# Altium PCB JLink_ARM-OB_072_Pcb.PcbDoc
Units mil, origin at the board's own origin, x right, y up, seen from the top; angles counter-clockwise.
Board outline 925 x 450 mil, 2 copper layers (Top Layer, Bottom Layer); 25 components, 25 nets, 113 pads, 26 vias.
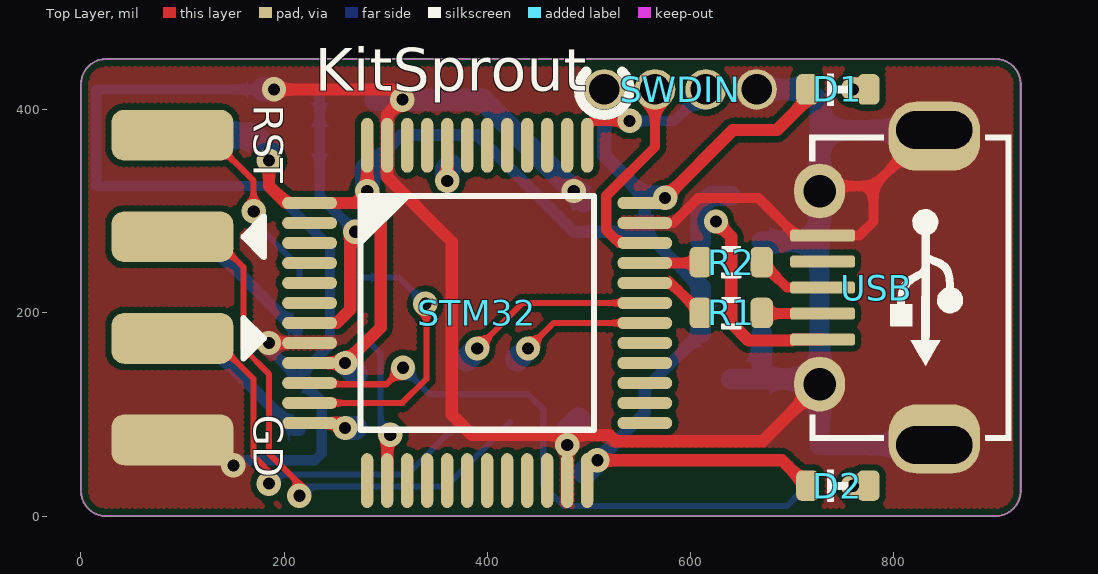
[diagram p0: Top Layer view]
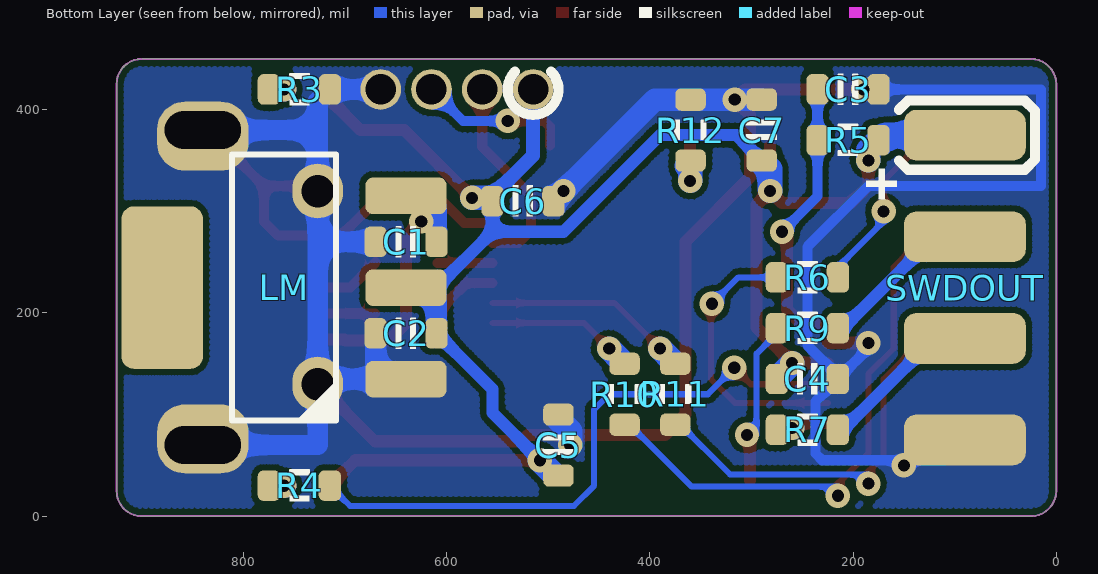
[diagram p1: Bottom Layer view, seen from below]
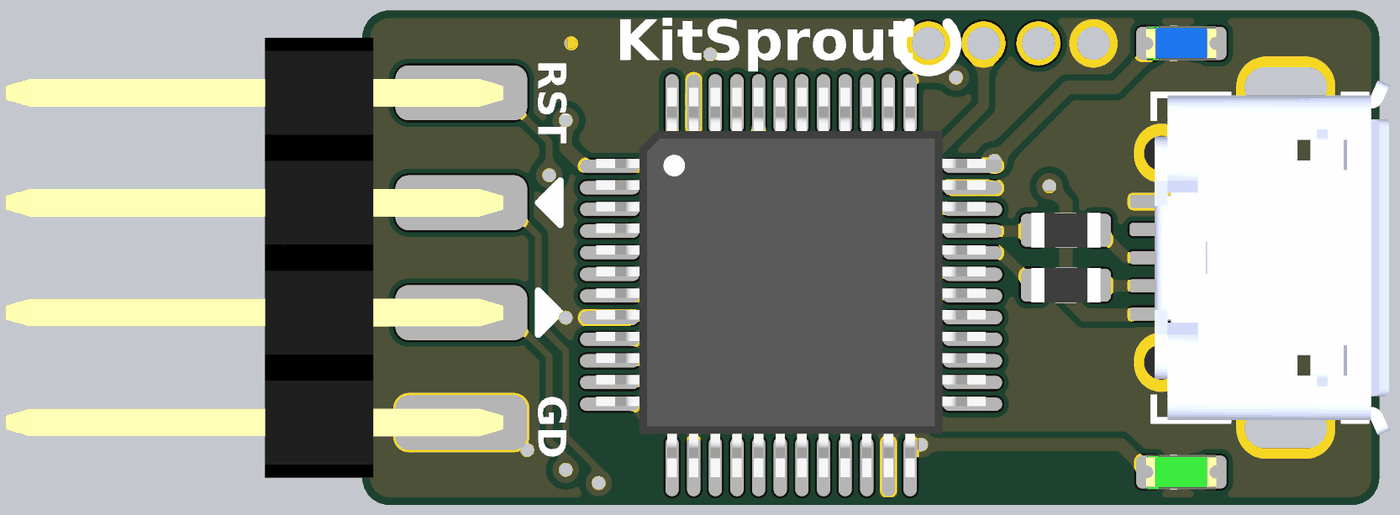
[diagram p2: 3D render of the assembled board from above, using the file's embedded part models]
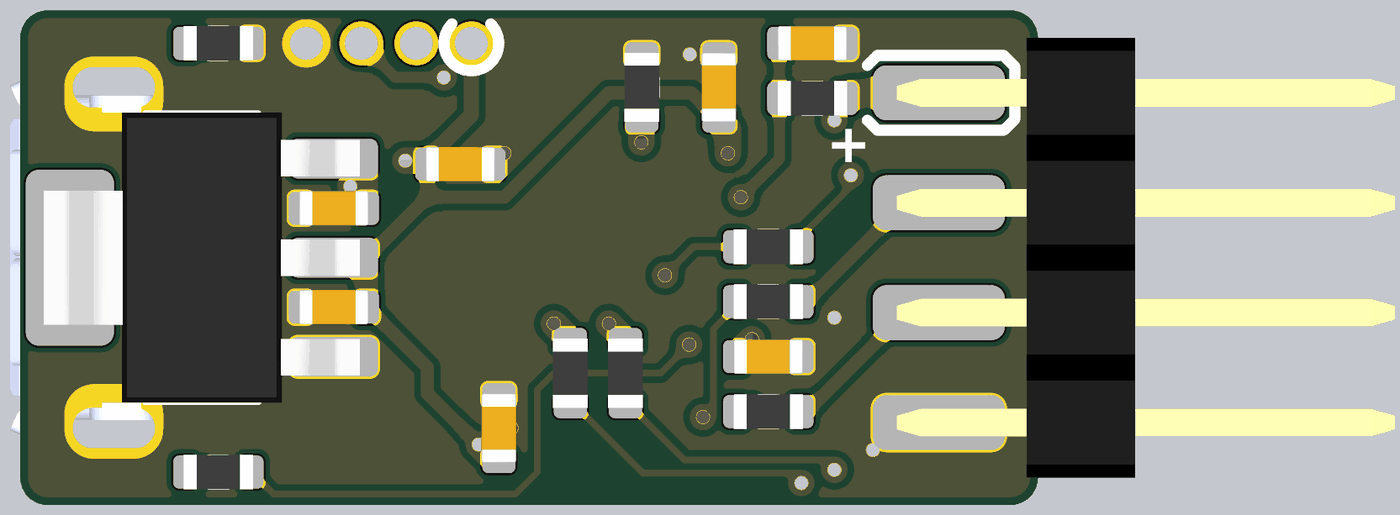
[diagram p3: 3D render of the assembled board from below, using the file's embedded part models]

## Layer stack, top to bottom
Top Solder: solder mask 0.4, Solder Resist, Dk 3.5
Top Layer: signal copper 1.4
Dielectric 1: dielectric 12.6, FR-4, Dk 4.8
Bottom Layer: signal copper 1.4
Bottom Solder: solder mask 0.4, Solder Resist, Dk 3.5

## Board outline
0,25 0,425 cw(c25,425) 25,450 900,450 cw(c900,425) 925,425 925,25 cw(c900,25) 900,0 25,0 cw(c25,25)

## Design rules (kind name [scope] priority, off if disabled: settings)
Clearance ClearancePolygon [InPolygon] p1: gap=6 ignorepadtopadclearanceinfootprint=FALSE except(0: Arc-Hole Track-Hole SMDPad-Hole THPad-Hole Via-Hole Fill-Hole Poly-Hole Region-Hole Text-Hole)
Clearance [All] p2: gap=6 ignorepadtopadclearanceinfootprint=FALSE except(0: Arc-Hole Track-Hole SMDPad-Hole THPad-Hole Via-Hole Fill-Hole Poly-Hole Region-Hole Text-Hole)
ComponentClearance [All] p1: gap=0 collisioncheckmode=3 verticalgap=0 showdistances=FALSE
Height [All] p1: minheight=0 maxheight=5000 prefheight=500
HoleSize [All] p1: absolutevalues=TRUE maxlimit=200 minlimit=1 maxpercent=80.000 minpercent=20.000
HoleToHoleClearance [All] p1: gap=6 allowstackedmicrovias=TRUE
MinimumSolderMaskSliver [All] p1: minsoldermaskwidth=0
PolygonConnect [All] p1: connectstyle=Direct reliefconductorwidth=10 reliefentries=4 polygonreliefangle="90 Angle" airgapwidth=10
RoutingVias [All] p1: holewidth=12 width=24 viastyle="Through Hole" minholewidth=12 minwidth=20 maxholewidth=28 maxwidth=50
SilkToSilkClearance [All] p1: silktosilkclearance=0
SilkToSolderMaskClearance [IsPad] p1: minsilkscreentomaskgap=0 clearancetoexposedcopper=TRUE
SolderMaskExpansion [All] p1: expansion=2 istentingtop=FALSE
Width [All] p1: maxlimit=50 minlimit=6 preferedwidth=10
23 further rules are at their usual default settings.

## Components (designator, comment, footprint, x,y, rotation, side; value= is the part's Value field where it differs from the comment)
C1 "Cap_0603" CAP_0603 640,270 r180 bottom
C2 "Cap_0603" CAP_0603 640,180 r180 bottom
C3 "Cap_0603" CAP_0603 205,420 r0 bottom
C4 "Cap_0603" CAP_0603 245,135 r0 bottom
C5 "Cap_0603" CAP_0603 490,70 r270 bottom
C6 "Cap_0603" CAP_0603 525,310 r0 bottom
C7 "Cap_0603" CAP_0603 290,380 r270 bottom
D1 "LED_0603" LED_0603_BLUE 745,420 r0 top
D2 "LED_0603" LED_0603_GREEN 745,30 r0 top
LM "LM1117" SOT223-3 760,225 r90 bottom
R1 "Res_0603" RES_0603 640,200 r180 top
R2 "Res_0603" RES_0603 640,250 r180 top
R3 "Res_0603" RES_0603 745,420 r0 bottom
R4 "Res_0603" RES_0603 745,30 r0 bottom
R5 "Res_0603" RES_0603 205,370 r180 bottom
R6 "Res_0603" RES_0603 245,235 r0 bottom
R7 "Res_0603" RES_0603 245,85 r0 bottom
R9 "Res_0603" RES_0603 245,185 r0 bottom
R10 "Res_0603" RES_0603 425,120 r90 bottom
R11 "Res_0603" RES_0603 375,120 r90 bottom
R12 "Res_0603" RES_0603 360,380 r270 bottom
STM32 "STM32F103C" LQFP_P0.5_48 390,200 r0 top
SWDIN "HDR1x4_1.27" HDR1X4_1.27_180 515,420 r90 top
SWDOUT "HDR2x4_2.54" HDR2X4_2.54_180H 90,375 r180 bottom
USB "USB_Micro" USB_Micro-AB 830,225 r270 top locked

## Footprints (in the part's own frame and the unit in brackets; to place one, negate y for a bottom-side part, rotate by r counter-clockwise, add the part's x,y. Pads: shape width x height; smd on the part's side, far side on the other; paste and mask are expansions set on the pad)
CAP_0603 [mil]
  rrect50% 22x30 smd: 1(-30,0) 2(30,0)
  silkscreen extent -10,-15 10,15, body extent -31,-16 32,16, height 31
HDR1X4_1.27_180 [mil]
  round 40 hole 30: 1(0,0) 2(0,-50) 3(0,-100) 4(0,-150)
HDR2X4_2.54_180H [mil]
  rrect50% 120x50 smd: 1(0,0) 3(0,-100) 5(0,-200) 7(0,-300)
  rrect50% 120x50 smd far side: 2(0,0) 4(0,-100) 6(0,-200) 8(0,-300)
  body extent -38,-350 415,50, height 100
LED_0603_BLUE [mil]
  rrect50% 22x30 smd: 1(-30,0) 2(30,0)
  silkscreen extent -10,-16 10,16, body extent -32,-16 32,16, height 24
LED_0603_GREEN [mil]
  rrect50% 22x30 smd: 1(-30,0) 2(30,0)
  silkscreen extent -10,-16 10,16, body extent -32,-16 32,16, height 24
LQFP_P0.5_48 [mil]
  oval 54x12 smd: 1(-165,108.27) 2(-165,88.58) 3(-165,68.9) 4(-165,49.21) 5(-165,29.53) 6(-165,9.84) 7(-165,-9.84) 8(-165,-29.53) 9(-165,-49.21) 10(-165,-68.9) 11(-165,-88.58) 12(-165,-108.27) 25(165,-108.27) 26(165,-88.58) 27(165,-68.9) 28(165,-49.21) 29(165,-29.53) 30(165,-9.84) 31(165,9.84) 32(165,29.53) 33(165,49.21) 34(165,68.9) 35(165,88.58) 36(165,108.27)
  oval 12x54 smd: 13(-108.27,-165) 14(-88.58,-165) 15(-68.9,-165) 16(-49.21,-165) 17(-29.53,-165) 18(-9.84,-165) 19(9.84,-165) 20(29.53,-165) 21(49.21,-165) 22(68.9,-165) 23(88.58,-165) 24(108.27,-165) 37(108.27,165) 38(88.58,165) 39(68.9,165) 40(49.21,165) 41(29.53,165) 42(9.84,165) 43(-9.84,165) 44(-29.53,165) 45(-49.21,165) 46(-68.9,165) 47(-88.58,165) 48(-108.27,165)
  silkscreen extent -115,-115 115,115, body extent -177,-175 177,180, height 61
RES_0603 [mil]
  rrect50% 22x30 smd: 1(-30,0) 2(30,0)
  silkscreen extent -10,-16 10,16, body extent -31,-16 31,16, height 18
SOT223-3 [mil]
  rrect40% 36x80 smd: 1(-90.16,-120) 2(0,-120) 3(90.16,-120)
  rrect30% 160x80 smd: 4(0,120)
  silkscreen extent -131,-51 131,51, body extent -132,-144 132,144, height 71
USB_Micro-AB [mil]
  rrect80% 68x90 hole 37 slot 75 at 90 deg copper offset 6,0 mask+0: 0(-155,10)
  oval 54x50 hole 32 mask+0: 0(-95,-103) 0(95,-103)
  rrect80% 68x90 hole 37 slot 75 at 90 deg copper offset -6,0 mask+0: 0(155,10)
  rrect50% 12x64 smd: 1(51.18,-100) 2(25.59,-100) 3(0,-100) 4(-25.59,-100) 5(-51.18,-100)
  silkscreen extent -151,-113 151,86, body extent -161,-109 161,104, height 108

## Part data
C1 C2 C3 C4 C5 C6 C7: "Capacitor"
D1 D2: "LED"
LM: "Power"
R1 R2 R3 R4 R5 R6 R7 R9 R10 R11 R12: "Resistor"
STM32: "MCU"
SWDIN SWDOUT: "Header"
USB: "USB"

## Via types
v1: diameter 24, hole 12, Top Layer to Bottom Layer, 26 vias

## Nets (pads, with @x,y where several pads share a name; then routed paths per layer and width w, separated by ;. In a path a pad name is that pad's centre, name@x,y a point inside that pad or via, vN(x,y) a via of type N, cw(c..) or ccw(c..) an arc to the next point about the centre after c; other vN are vias at no path point)
3V3: C2.2 C4.2 C5.2 C6.2 C7.2 D1.1 D2.1 LM.2 R5.2 STM32.1 STM32.9 STM32.24 STM32.36 STM32.48 SWDIN.1 SWDOUT.1 | length 1762.1
  Top Layer w12: v1(185,350) 185,325 201.73,308.27 STM32.1 270,308.27 v1(281.73,320) 295,306.73 295,185.79 v1(260,150.79) STM32.9 ; v1@281.73,330 STM32.48 ; v1(508.27,55) 690,55 D2.1 ; v1(575,313.27) 641.73,380 685,380 715,410 D1.1
  Bottom Layer w12: C7.2 315,375 390,375 485,280 555,280 ; v1(508.27,55) 555,101.73 555,125 C2.2 ; C6.2 555,280 ; LM.2@610,225 555,280
  Bottom Layer w14: SWDIN.1 515,355 C6.2@560,310
  Bottom Layer w20: C2.2 LM.2@610,225
  Bottom Layer w24: SWDOUT.1@75,375 170,375 185,360 v1(185,350) ; v1(260,150.79) C4.2@270.39,140.39 ; v1(281.73,320) 281.73,341.73 C7.2@285,345 ; C5.2@496.44,43.17 v1(508.27,55) ; C6.2@560,313.27 v1(575,313.27)
BOOT: R12.2 STM32.44 | length 51.4
  Top Layer w12: v1(360.47,330) STM32.44
  Bottom Layer w24: v1(360.47,330) 360.47,341.73 R12.2@363.74,345
GND: C1.1 C2.1 C3.1 C4.1 C5.1 C6.1 C7.1 LM.1 R3.1 R12.1 STM32.8 STM32.23 STM32.35 STM32.47 SWDIN.4 SWDOUT.7 SWDOUT.8 USB.0 USB.5 | length 3405.8
  Top Layer w10: STM32.35 582.84,288.58 607.26,313 667,313 703.82,276.18 USB.5 766.18,276.18 780,290 780,325 ; USB.0@727,320 732,325 780,325 ; USB.0@840,380 835,380 780,325
  Top Layer w12: v1(185,170.47) STM32.8 ; v1(190,420) 306.42,420 v1(316.42,410) 301.42,395 STM32.47 301.42,333.75 365,270.17 365,100 385,80 v1@478.58,80 ; v1@478.58,75 v1(478.58,70) ; v1@482.7,65.89 v1(478.58,70) ; USB.0@727,130 670.73,73.73 526.27,73.73 520,80 v1@478.58,80 ; v1(478.58,70) v1@478.58,80
  Bottom Layer w10: SWDOUT.7 110,55 230.33,55 237,61.67 237,113 C4.1 ; C3.1 15,420 15,325 185,325 245,265 245,168.31 215,138.31 C4.1 ; v1@182.26,167.74 C4.1
  Bottom Layer w12: v1(478.58,70) v1@480,70
  Bottom Layer w20: LM.1 LM.1@670,134.84 ; SWDIN.4 R3.1 727,408 727,380 ; C2.1 LM.1@670,134.84 ; C1.1 727,270 ; USB.0@840,70 727,70 727,130 USB.0@727,134.84 ; USB.0@840,380 727,380 ; LM.1@670,134.84 USB.0@727,134.84 ; USB.0@727,134.84 727,270 ; 727,270 727,320 727,380
  Bottom Layer w22: C7.1 v1(316.42,410) R12.1 395,410 C6.1
  Bottom Layer w24: C3.1@180,420 v1(190,420) ; v1(478.58,70) 478.58,83.58 C5.1@490,95
  other v1: 150,50 485,320
ISWCLK: STM32.37 SWDIN.3 | length 150.2
  Top Layer w10: STM32.37 498.27,383.27 504,389 v1(540,389)
  Bottom Layer w10: v1(540,389) 584,389 SWDIN.3
ISWDIO: STM32.34 SWDIN.2 | length 203.2
  Top Layer w10: STM32.34 529.64,268.9 529.64,271.58 526.96,271.58 517,281.54 517,315.31 565,363.31 SWDIN.2
LED: R4.1 STM32.10 | length 606.6
  Top Layer w6: STM32.10 225,129.79 300.79,129.79 v1(317,146)
  Bottom Layer w6: v1(317,146) 343,120 440,120 455,105 455,30 475,10 695,10 R4.1
NetD1_2: D1.2 R3.2 | length 20
  Top Layer w24: v1(760,420) D1.2@770,420
  Bottom Layer w24: v1(760,420) R3.2@770,420
NetD2_2: D2.2 R4.2 | length 20
  Top Layer w24: v1(760,30) D2.2@770,30
  Bottom Layer w24: v1(760,30) R4.2@770,30
NetR1_1: R1.1 USB.2 | length 59.4
  Top Layer w10: R1.1@670.59,199.41 USB.2
NetR2_1: R2.1 USB.3 | length 70.4
  Top Layer w10: R2.1 695,225 USB.3
NetR6_2: R6.2 STM32.11 | length 273.5
  Top Layer w6: STM32.11 316.42,111.42 340,135 v1@340,209
  Bottom Layer w6: R6.2 313,235 v1(339,209)
NetR7_2: R7.2 STM32.12 | length 45
  Top Layer w12: STM32.12 v1@260,91.73
  Bottom Layer w24: v1(260,86.73) R7.2@270,86.73
NetR9_2: R9.2 STM32.14 | length 155.4
  Top Layer w12: STM32.14 301.42,75 v1@306.42,80
  Bottom Layer w6: R9.2@275,180 295,160 v1@295,80
  other v1: 304.42,80
NetR10_2: R10.2 STM32.30 | length 140.1
  Top Layer w6: v1(440,165) 465.16,190.16 STM32.30
  Bottom Layer w24: R10.2@429.61,154.61 v1(440,165)
NetR11_2: R11.2 STM32.31 | length 198.3
  Top Layer w6: v1(390,165) 434.84,209.84 STM32.31
  Bottom Layer w24: R11.2@379.61,154.61 v1(390,165)
RST: C3.2 R5.1 STM32.7 | length 276.6
  Top Layer w12: STM32.7 251.77,190.16 265,203.39 v1@265,280
  Bottom Layer w10: C3.2 R5.1 235,315 v1(270,280)
TRST: R6.1 SWDOUT.2 | length 209.4
  Top Layer w6: SWDOUT.2@125,375 170,330 v1(170,300)
  Top Layer w10: SWDOUT.2@75,375 SWDOUT.2@110,375
  Bottom Layer w6: v1@165,295 215,245 R6.1
TRX: R11.1 SWDOUT.6 | length 426.1
  Top Layer w6: SWDOUT.6@75,175 130,175 170,135 170,59 v1@191,38
  Bottom Layer w6: v1@185,41 321,41 R11.1@372.5,92.5
  other v1: 185,32
TSWC: R7.1 SWDOUT.5 | length 177.3
  Bottom Layer w12: SWDOUT.5@75,175 120,175 210,85 R7.1
TSWD: R9.1 SWDOUT.3 | length 160.8
  Bottom Layer w12: SWDOUT.3 120,275 R9.1@212.5,182.5
TSWO: STM32.13
TTX: R10.1 SWDOUT.4 | length 574.8
  Top Layer w6: SWDOUT.4@75,275 130,275 160,245 160,165 185,140 185,62 v1@220.5,26.5
  Bottom Layer w6: v1@215,29 359,29 R10.1@422.5,92.5
  other v1: 215,20
USB_DM: R1.2 STM32.32 | length 67.2
  Top Layer w10: STM32.32 580.47,229.53 R1.2
USB_DP: R2.2 STM32.33 | length 54.2
  Top Layer w10: STM32.33 R2.2@609.21,249.21
VUSB: C1.2 LM.3 USB.1 | length 272.8
  Top Layer w12: v1(625,290) 640,275 640,190 657,173 700,173 700.82,173.82 USB.1
  Bottom Layer w20: C1.2 610,305 620.16,315.16 LM.3
pads on no net: LM.4 STM32.2 STM32.3 STM32.4 STM32.5 STM32.6 STM32.15 STM32.16 STM32.17 STM32.18 STM32.19 STM32.20 STM32.21 STM32.22 STM32.25 STM32.26 STM32.27 STM32.28 STM32.29 STM32.38 STM32.39 STM32.40 STM32.41 STM32.42 STM32.43 STM32.45 STM32.46 USB.4

## Polygon pours and split planes (outlines as drawn)
no net on Keep-Out Layer "keepout" (none): 0,25 0,425 cw(c25,425) 25,450 900,450 cw(c900,425) 925,425 925,25 cw(c900,25) 900,0 25,0 cw(c25,25)
GND on Top Layer "topLayer" (hatched 45Degree grid 4 track 6, remove dead copper, pour order 4): 0,25 0,425 cw(c25,425) 25,450 900,450 cw(c900,425) 925,425 925,25 cw(c900,25) 900,0 25,0 cw(c25,25)
GND on Bottom Layer "bottomLayer" (hatched 45Degree grid 4 track 6, remove dead copper, pour order 5): 0,25 0,425 cw(c25,425) 25,450 900,450 cw(c900,425) 925,425 925,25 cw(c900,25) 900,0 25,0 cw(c25,25)

## Silkscreen, mask and mechanical layers (free items; w line width, h text height)
Top Overlay:
  region: 160,275 180,295 180,255
  region: 180,175 160,155 160,195
  lines w6: 160,155 180,175 160,195 160,155 ; 160,275 180,295 180,255 160,275
  lines w10: 497.32,437.68 ccw(c515,420) 532.68,437.68
  text "RST" at 160,405 h50 r270
  text "KitSprout" at 230,405 h72
  text "GD" at 160,100 h50 r270
Bottom Overlay:
  region: 175,312 175,324 187,324 187,330 175,330 175,342 169,342 169,330 157,330 157,324 169,324 169,312
  lines w10: 155,350 146,341 31,341 21,351 21,399 31,409 146,409 155,400 ; 497.32,437.68 ccw(c515,420) 532.68,437.68
Mechanical 1:
  the board outline again, w2